# Altium PCB Kame_IMU.PcbDoc
Units mm, origin at the board's own origin, x right, y up, seen from the top; angles counter-clockwise.
Board outline 82.1 x 15 mm, 4 copper layers (Top Layer, Signal Layer 2, Signal Layer 1, Bottom Layer), stack 0.847 mm thick; 51 components, 28 nets, 198 pads, 129 vias.
Unrouted connection lines stored in the file: 16.
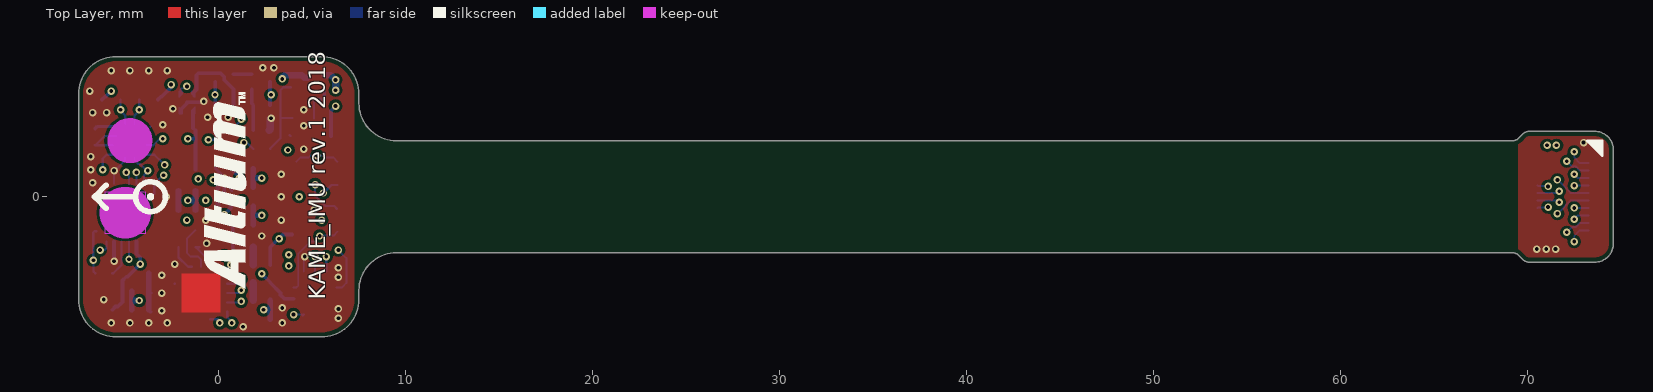
[diagram p0: Top Layer view]
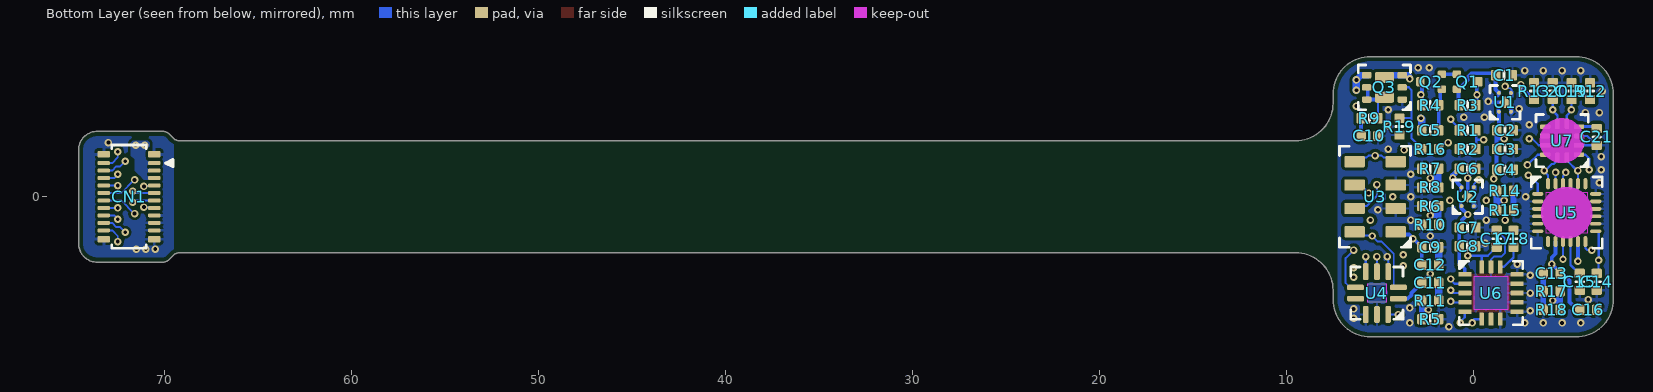
[diagram p1: Bottom Layer view, seen from below]
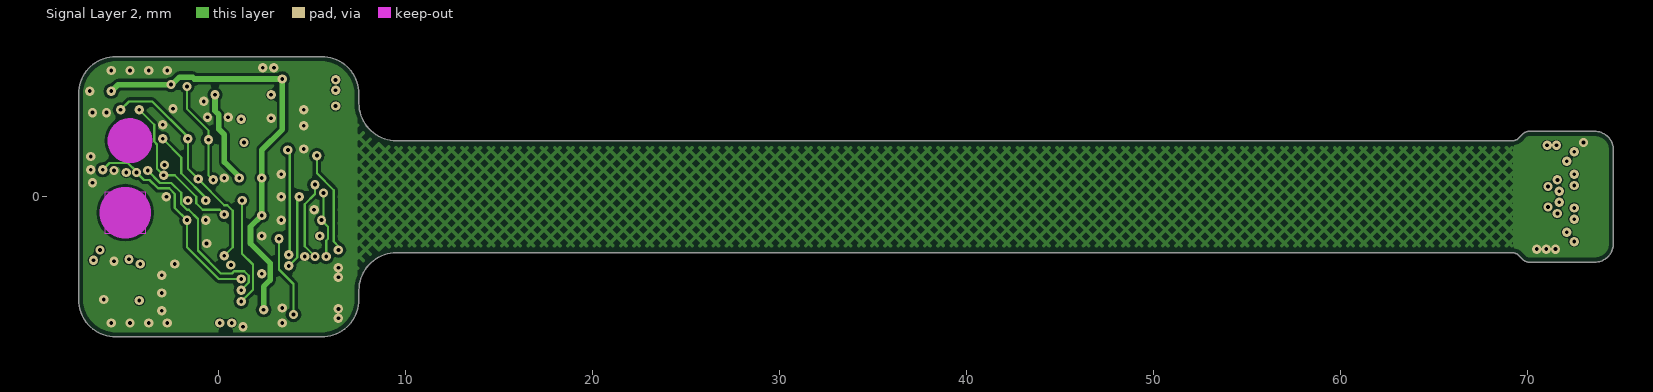
[diagram p2: Signal Layer 2]
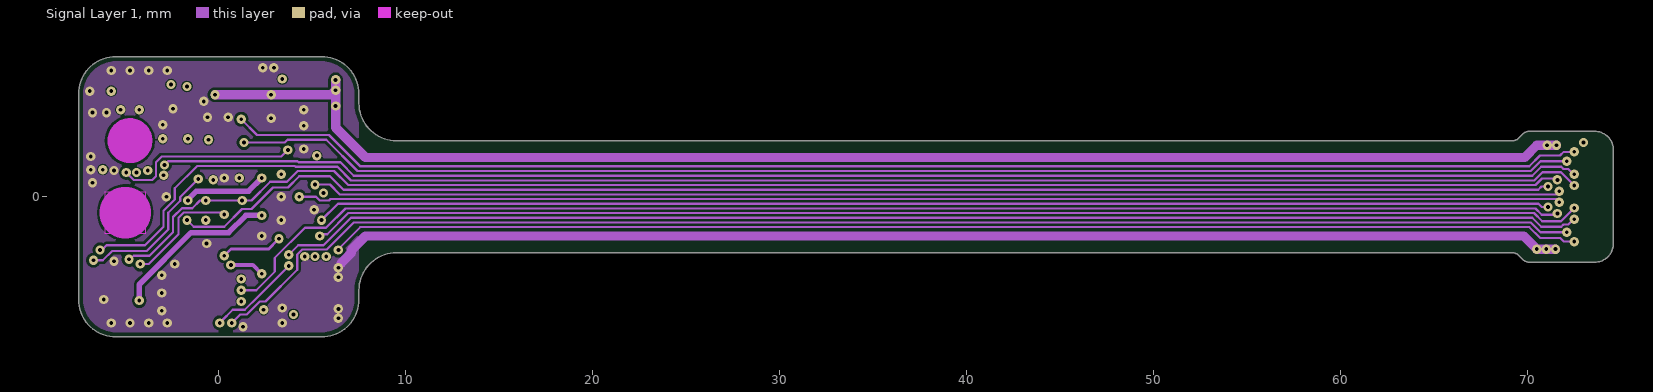
[diagram p3: Signal Layer 1]
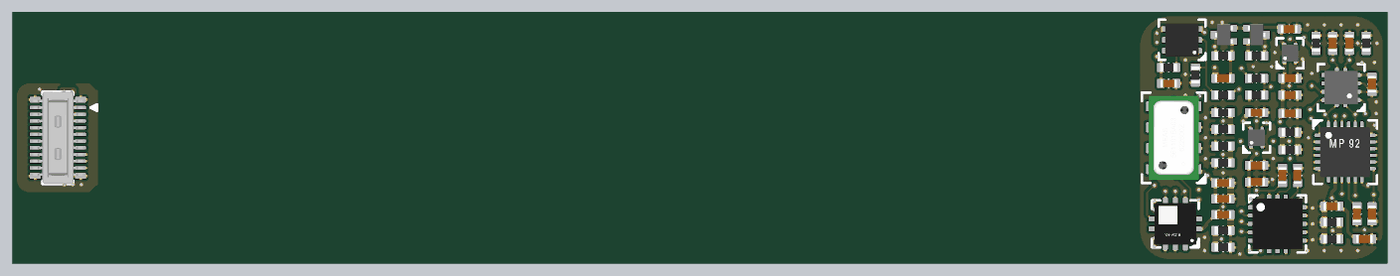
[diagram p4: 3D render of the assembled board from below, using the file's embedded part models]

## Layer stack, top to bottom
Top Solder: solder mask 0.0102, Solder Resist, Dk 3.5
Top Layer: signal copper 0.018
Dielectric 1: dielectric 0.2, FR-4, Dk 4.8
Dielectric 2: dielectric 0.125, Prepreg, Dk 4.2
Coverlay 1: dielectric 0.05, Polyimide, Dk 4.5
Signal Layer 2: signal copper 0.018
Dielectric 4: dielectric 0.025, Polyimide, Dk 4.2
Signal Layer 1: signal copper 0.018
Coverlay 2: dielectric 0.05, Polyimide, Dk 4.5
Dielectric 5: dielectric 0.125, Prepreg, Dk 4.2
Dielectric 6: dielectric 0.2, FR-4, Dk 4.2
Bottom Layer: signal copper 0.018
Bottom Solder: solder mask 0.0102, Solder Resist, Dk 3.5

## Board outline
-5.5,-7.5 5.5,-7.5 ccw(c5.5,-5.5) 7.5,-5.5 7.5,-5 cw(c9.5,-5) 9.5,-3 69.2,-3 cw(c69.2,-3.5) 69.501,-3.101 69.5,-3.1 69.5,-3.106 69.765,-3.372 ccw(c70.1,-3) 70.1,-3.5 73.6,-3.5 ccw(c73.6,-2.5) 74.6,-2.5 74.6,2.5 ccw(c73.6,2.5) 73.6,3.5 70.1,3.5 ccw(c70.1,3) 69.765,3.372 69.765,3.365 69.501,3.101 cw(c69.2,3.5) 69.2,3 9.5,3 cw(c9.5,5) 7.5,5 7.5,5.5 ccw(c5.5,5.5) 5.5,7.5 -5.5,7.5 ccw(c-5.5,5.5) -7.5,5.5 -7.5,-5.5 ccw(c-5.5,-5.5)
board region A: 7.5,-5.697 7.423,-6.083 7.272,-6.447 7.054,-6.775 6.775,-7.053 6.447,-7.272 6.083,-7.423 5.697,-7.5 5.5,-7.5 -5.5,-7.5 -5.697,-7.5 -6.083,-7.423 -6.447,-7.272 -6.775,-7.054 -7.054,-6.775 -7.272,-6.447 -7.423,-6.083 -7.5,-5.697 -7.5,-5.5 -7.5,5.5 -7.5,5.697 -7.423,6.083 -7.272,6.447 -7.054,6.775 -6.775,7.054 -6.447,7.272 -6.083,7.423 -5.697,7.5 -5.5,7.5 5.5,7.5 5.697,7.5 6.083,7.423 6.447,7.272 6.775,7.054 7.054,6.775 7.272,6.447 7.423,6.083 7.5,5.697
board region B: 69.25,-3.003 69.24,-3.002 69.2,-3 9.5,-3 9.304,-3.01 8.919,-3.086 8.557,-3.236 8.231,-3.454 7.954,-3.731 7.736,-4.057 7.586,-4.419 7.51,-4.804 7.5,-5 7.5,5 7.51,4.804 7.586,4.419 7.736,4.057 7.954,3.731 8.231,3.454 8.557,3.236 8.919,3.086 9.304,3.01 9.5,3 69.2,3 69.24,3.002 69.25,3.003
board region C: 69.25,3.003 69.32,3.015 69.396,3.04 69.468,3.078 69.501,3.101 69.765,3.365 69.8,3.402 69.878,3.45 69.964,3.483 70.054,3.5 70.1,3.5 73.6,3.5 73.698,3.5 73.892,3.462 74.074,3.386 74.237,3.277 74.377,3.137 74.486,2.974 74.562,2.792 74.6,2.598 74.6,2.5 74.6,-2.5 74.6,-2.598 74.562,-2.792 74.486,-2.974 74.377,-3.137 74.237,-3.277 74.074,-3.386 73.892,-3.462 73.698,-3.5 73.6,-3.5 70.1,-3.5 70.054,-3.5 69.964,-3.483 69.878,-3.45 69.8,-3.402 69.765,-3.372 69.5,-3.106 69.468,-3.078 69.396,-3.04 69.32,-3.015 69.25,-3.003

## Design rules (kind name [scope] priority, off if disabled: settings)
BoardOutlineClearance [not OnSilkscreen] p1: gap=0.25 ignorepadtopadclearanceinfootprint=FALSE except(0: Arc-SplitBarrior Arc-SplitContinuation Track-SplitBarrior Track-SplitContinuation SMDPad-SplitBarrior SMDPad-SplitContinuation THPad-SplitBarrior THPad-SplitContinuation Via-SplitBarrior Via-SplitContinuation Fill-SplitBarrior Fill-SplitContinuation Poly-SplitBarrior Poly-SplitContinuation Region-SplitBarrior Region-SplitContinuation Text-SplitBarrior Text-SplitContinuation)
Clearance "Outline/NPTH clearance" [(IsThruPin and (PadisPlated = 'False')) or IsBoardOutline or IsBoardCutoutRegion] p1: gap=0.25 ignorepadtopadclearanceinfootprint=FALSE
Clearance "Polygon clearance 18um" [InPolygon] p2: gap=0.15 ignorepadtopadclearanceinfootprint=FALSE except(0.2: Arc-Hole Track-Hole SMDPad-Hole THPad-Hole Via-Hole Fill-Hole Poly-Hole Region-Hole Text-Hole)
Clearance "Default clearance" [All] p3: gap=0.1 ignorepadtopadclearanceinfootprint=FALSE except(0.2: Arc-Hole Track-Hole SMDPad-Hole THPad-Hole Via-Hole Fill-Hole Poly-Hole Region-Hole Text-Hole)
ComponentClearance [All] p1: gap=0.15 collisioncheckmode=3 verticalgap=0.254 showdistances=FALSE
DiffPairsRouting [All] p1: maxlimit=0.5 minlimit=0.2 mostfreqgap=0.3 substack1={CF774DB4-C4B5-4013-BC47-89C42F72042F} toplayer_{cf774db4-c4b5-4013-bc47-89c42f72042f}_minwidth=0.381 toplayer_{cf774db4-c4b5-4013-bc47-89c42f72042f}_maxwidth=0.381 toplayer_{cf774db4-c4b5-4013-bc47-89c42f72042f}_prefwidth=0.381 midlayer1_{cf774db4-c4b5-4013-bc47-89c42f72042f}_minwidth=0.381 midlayer1_{cf774db4-c4b5-4013-bc47-89c42f72042f}_maxwidth=0.381 midlayer1_{cf774db4-c4b5-4013-bc47-89c42f72042f}_prefwidth=0.381 midlayer2_{cf774db4-c4b5-4013-bc47-89c42f72042f}_minwidth=0.381 midlayer2_{cf774db4-c4b5-4013-bc47-89c42f72042f}_maxwidth=0.381 midlayer2_{cf774db4-c4b5-4013-bc47-89c42f72042f}_prefwidth=0.381 bottomlayer_{cf774db4-c4b5-4013-bc47-89c42f72042f}_minwidth=0.381 bottomlayer_{cf774db4-c4b5-4013-bc47-89c42f72042f}_maxwidth=0.381 bottomlayer_{cf774db4-c4b5-4013-bc47-89c42f72042f}_prefwidth=0.381 toplayer_minwidth=0.2 toplayer_maxwidth=0.4 toplayer_prefwidth=0.3 midlayer1_mingap=0.254 midlayer1_maxgap=0.254 midlayer1_prefgap=0.254 midlayer1_minwidth=0.381 midlayer1_maxwidth=0.381 midlayer1_prefwidth=0.381 midlayer2_mingap=0.254 midlayer2_maxgap=0.254 midlayer2_prefgap=0.254 midlayer2_minwidth=0.381 midlayer2_maxwidth=0.381 midlayer2_prefwidth=0.381 bottomlayer_minwidth=0.2 bottomlayer_maxwidth=0.4 bottomlayer_prefwidth=0.3 substack2={EF92E49D-E956-4B48-8936-570E05CDE32B} toplayer_{ef92e49d-e956-4b48-8936-570e05cde32b}_minwidth=0.381 toplayer_{ef92e49d-e956-4b48-8936-570e05cde32b}_maxwidth=0.381 toplayer_{ef92e49d-e956-4b48-8936-570e05cde32b}_prefwidth=0.381 midlayer1_{ef92e49d-e956-4b48-8936-570e05cde32b}_minwidth=0.381 midlayer1_{ef92e49d-e956-4b48-8936-570e05cde32b}_maxwidth=0.381 midlayer1_{ef92e49d-e956-4b48-8936-570e05cde32b}_prefwidth=0.381 midlayer2_{ef92e49d-e956-4b48-8936-570e05cde32b}_minwidth=0.381 midlayer2_{ef92e49d-e956-4b48-8936-570e05cde32b}_maxwidth=0.381 midlayer2_{ef92e49d-e956-4b48-8936-570e05cde32b}_prefwidth=0.381 bottomlayer_{ef92e49d-e956-4b48-8936-570e05cde32b}_minwidth=0.381 bottomlayer_{ef92e49d-e956-4b48-8936-570e05cde32b}_maxwidth=0.381 bottomlayer_{ef92e49d-e956-4b48-8936-570e05cde32b}_prefwidth=0.381 substack3={606AA3D4-FED0-4965-9D04-BDCEF9F4D30A} toplayer_{606aa3d4-fed0-4965-9d04-bdcef9f4d30a}_minwidth=0.381 toplayer_{606aa3d4-fed0-4965-9d04-bdcef9f4d30a}_maxwidth=0.381 toplayer_{606aa3d4-fed0-4965-9d04-bdcef9f4d30a}_prefwidth=0.381 midlayer1_{606aa3d4-fed0-4965-9d04-bdcef9f4d30a}_minwidth=0.381 midlayer1_{606aa3d4-fed0-4965-9d04-bdcef9f4d30a}_maxwidth=0.381 midlayer1_{606aa3d4-fed0-4965-9d04-bdcef9f4d30a}_prefwidth=0.381 midlayer2_{606aa3d4-fed0-4965-9d04-bdcef9f4d30a}_minwidth=0.381 midlayer2_{606aa3d4-fed0-4965-9d04-bdcef9f4d30a}_maxwidth=0.381 midlayer2_{606aa3d4-fed0-4965-9d04-bdcef9f4d30a}_prefwidth=0.381 bottomlayer_{606aa3d4-fed0-4965-9d04-bdcef9f4d30a}_minwidth=0.381 bottomlayer_{606aa3d4-fed0-4965-9d04-bdcef9f4d30a}_maxwidth=0.381 bottomlayer_{606aa3d4-fed0-4965-9d04-bdcef9f4d30a}_prefwidth=0.381 maxuncoupledlength=12.7
HoleSize [All] p1: absolutevalues=TRUE maxlimit=6 minlimit=0.2 maxpercent=80.000 minpercent=20.000
HoleToHoleClearance [All] p1: gap=0.2 allowstackedmicrovias=FALSE
MaximumViaCount [InNet('VCC5FMU')] p1: limit=100
MinimumAnnularRing "Top layer annular ring" [OnLayer('Top Layer')] p1: minimumring=0.1
MinimumAnnularRing "Bottom layer annular ring" [OnLayer('Bottom Layer')] p2: minimumring=0.1
MinimumAnnularRing "L2 annular ring" [OnLayer('Signal Layer 1')] p3: minimumring=0.15
MinimumAnnularRing "L3 annular ring" [OnLayer('Signal Layer 2')] p4: minimumring=0.15
MinimumSolderMaskSliver [All] p1: minsoldermaskwidth=0.1
PlaneClearance [All] p1: clearance=0.2
PlaneConnect [All] p1: pad.planeconnectstyle=Relief pad.reliefexpansion=0.2 pad.reliefentries=4 pad.reliefconductorwidth=0.15 pad.reliefairgap=0.15 via.planeconnectstyle=Direct via.reliefexpansion=0.508 via.reliefentries=4 via.reliefconductorwidth=0.254 via.reliefairgap=0.254
PolygonConnect "Ground polygon connect" [IsPolygon vs InNet('GND') And IsVia] p1: connectstyle=Direct reliefconductorwidth=0.254 reliefentries=4 polygonreliefangle="90 Angle" airgapwidth=0.254
PolygonConnect [All] p2: connectstyle=Relief reliefconductorwidth=0.15 reliefentries=4 polygonreliefangle="90 Angle" airgapwidth=0.15
RoutingVias [All] p1: holewidth=0.2 width=0.4 viastyle="Through Hole" minholewidth=0.2 minwidth=0.4 maxholewidth=0.5 maxwidth=1
SilkToSilkClearance [All] p1: silktosilkclearance=0
SilkToSolderMaskClearance [IsPad] p1: minsilkscreentomaskgap=0.05 clearancetoexposedcopper=TRUE
SolderMaskExpansion [All] p1: expansion=0.05 istentingtop=FALSE
Width [All] p1: maxlimit=1 minlimit=0.1 preferedwidth=0.15 substack1={CF774DB4-C4B5-4013-BC47-89C42F72042F} substack2={EF92E49D-E956-4B48-8936-570E05CDE32B} substack3={606AA3D4-FED0-4965-9D04-BDCEF9F4D30A}
21 further rules are at their usual default settings.

## Classes and differential pairs
component class 2_power: C1 C2 C3 C4 C5 C6 C7 C8 Q1 Q2 R1 R2 R3 R4 U1 U2
component class 3_sensors: C9 C10 C11 C12 C13 C14 C15 C16 C17 C18 C19 C20 C21 CN1 Q3 R5 R6 R7 R8 R9 R10 R11 R12 R13 R14 R15 R16 R17 R18 R19 U3 U4 U5 U6 U7

## Components (designator, comment, footprint, x,y, rotation, side; value= is the part's Value field where it differs from the comment)
C1 "Capacitor 2,2µF +/-20% 10V 0402" CAPC0402(1005)60_L -1.65,6.5 r0 bottom value=2.2µF
C2 "Capacitor 100nF +/-20% 10V 0402" CAPC0402(1005)60_L -1.7,3.55 r0 bottom value=100nF
C3 "Capacitor 10µF +/-40% 6.3V 0402" CAPC0402(1005)60_L -1.7,2.55 r0 bottom value=10µF
C4 "Capacitor 10µF +/-40% 6.3V 0402" CAPC0402(1005)60_L -1.7,1.45 r0 bottom value=10µF
C5 "Capacitor 10µF +/-40% 6.3V 0402" CAPC0402(1005)60_L 2.3,3.55 r180 bottom value=10µF
C6 "Capacitor 2,2µF +/-20% 10V 0402" CAPC0402(1005)60_L 0.3,1.5 r0 bottom value=2.2µF
C7 "Capacitor 100nF +/-20% 10V 0402" CAPC0402(1005)60_L 0.3,-1.65 r0 bottom value=100nF
C8 "Capacitor 10µF +/-40% 6.3V 0402" CAPC0402(1005)60_L 0.3,-2.65 r0 bottom value=10µF
C9 "Capacitor 100nF +/-20% 10V 0402" CAPC0402(1005)60_L 2.3,-2.7 r0 bottom value=100nF
C10 "Capacitor 100nF +/-20% 10V 0402" CAPC0402(1005)60_L 5.55,3.25 r0 bottom value=100nF
C11 "Capacitor 100nF +/-20% 10V 0402" CAPC0402(1005)60_L 2.3,-4.6 r0 bottom value=100nF
C12 "Capacitor 100nF +/-20% 10V 0402" CAPC0402(1005)60_L 2.3,-3.65 r0 bottom value=100nF
C13 "Capacitor 100nF +/-20% 10V 0402" CAPC0402(1005)60_L -4.2,-4.1 r180 bottom value=100nF
C14 "Capacitor 100nF +/-20% 10V 0402" CAPC0402(1005)60_L -6.6,-4.55 r90 bottom value=100nF
C15 "Capacitor 100nF +/-20% 10V 0402" CAPC0402(1005)60_L -5.7,-4.55 r90 bottom value=100nF
C16 "Capacitor 100nF +/-20% 10V 0402" CAPC0402(1005)60_L -6.15,-6.05 r0 bottom value=100nF
C17 "Capacitor 100nF +/-20% 10V 0402" CAPC0402(1005)60_L -1.25,-2.25 r270 bottom value=100nF
C18 "Capacitor 470nF +/-40% 10V 0402" CAPC0402(1005)60_L -2.15,-2.25 r270 bottom value=470nF
C19 "Capacitor 100nF +/-20% 10V 0402" CAPC0402(1005)60_L -5.25,5.65 r270 bottom value=100nF
C20 "Capacitor 100nF +/-20% 10V 0402" CAPC0402(1005)60_L -4.25,5.65 r270 bottom value=100nF
C21 "Capacitor 100nF +/-20% 10V 0402" CAPC0402(1005)60_L -6.6,3.2 r90 bottom value=100nF
CN1 "DF40C-20DP-0.4V(51)" HIRO-DF40C-20DP-0.4V(51)_V 71.9,0 r270 bottom locked
Q1 "MMBT2222AM3T5G" ROHM-SOT723-3_V 0.3,6.15 r180 bottom
Q2 "MMBT2222AM3T5G" ROHM-SOT723-3_V 2.25,6.15 r0 bottom
Q3 "DMC1030UFDBQ-7" DMC1030UFDBQ-7-Footprint-1 4.75,5.85 r0 bottom
R1 "Resistor 1K +/-5 % 0402 63 mW" RESC0402(1005)_L 0.3,3.55 r180 bottom value=1k
R2 "Resistor 1M +/-5 % 0402 63 mW" RESC0402(1005)_L 0.3,2.55 r180 bottom value=1M
R3 "Jumper 0402" RESC0402(1005)_L 0.3,4.9 r0 bottom value=0
R4 "Resistor 1K +/-5 % 0402 63 mW" RESC0402(1005)_L 2.3,4.9 r0 bottom value=1k
R5 "Resistor 240R +/-5 % 0402 63 mW" RESC0402(1005)_L 2.3,-6.55 r180 bottom value=240
R6 "Resistor 240R +/-5 % 0402 63 mW" RESC0402(1005)_L 2.3,-0.5 r0 bottom value=240
R7 "Resistor 240R +/-5 % 0402 63 mW" RESC0402(1005)_L 2.3,1.5 r0 bottom value=240
R8 "Resistor 240R +/-5 % 0402 63 mW" RESC0402(1005)_L 2.3,0.5 r0 bottom value=240
R9 "Resistor 1M +/-5 % 0402 63 mW" RESC0402(1005)_L 5.55,4.2 r0 bottom value=1M
R10 "Resistor 240R +/-5 % 0402 63 mW" RESC0402(1005)_L 2.3,-1.5 r0 bottom value=240
R11 "Resistor 240R +/-5 % 0402 63 mW" RESC0402(1005)_L 2.3,-5.55 r180 bottom value=240
R12 "Resistor 240R +/-5 % 0402 63 mW" RESC0402(1005)_L -6.25,5.65 r90 bottom value=240
R13 "Resistor 240R +/-5 % 0402 63 mW" RESC0402(1005)_L -3.25,5.65 r90 bottom value=240
R14 "Resistor 240R +/-5 % 0402 63 mW" RESC0402(1005)_L -1.7,0.325 r180 bottom value=240
R15 "Resistor 240R +/-5 % 0402 63 mW" RESC0402(1005)_L -1.7,-0.725 r180 bottom value=240
R16 "Resistor 1K +/-5 % 0402 63 mW" RESC0402(1005)_L 2.3,2.55 r0 bottom value=1k
R17 "Resistor 240R +/-5 % 0402 63 mW" RESC0402(1005)_L -4.2,-5.05 r0 bottom value=240
R18 "Resistor 240R +/-5 % 0402 63 mW" RESC0402(1005)_L -4.2,-6.05 r0 bottom value=240
R19 "Resistor 1M +/-5 % 0402 63 mW" RESC0402(1005)_L 3.95,3.75 r90 bottom value=1M
U1 "LP5907SNX-3.3" TI-DQN4-480X480TP_V -1.7,5.05 r90 bottom
U2 "LP5907SNX-3.3" TI-DQN4-480X480TP_V 0.3,0 r90 bottom
U3 "MS561101BA03-50" TECO-MS561101BA03_V 5.25,0 r0 bottom locked
U4 "LPS25HBTR" STM-LGA-10 5.15,-5.15 r0 bottom
U5 "MPU-9250" INSE-QFN-24-1700X1540TP_N -5,-0.85 r180 bottom locked
U6 "ICM-20602" INSE-I62-16 -0.95,-5.15 r180 bottom locked
U7 "LIS3MDLTR" STM-LGA-12 -4.75,3 r0 bottom

## Footprints (in the part's own frame and the unit in brackets; to place one, negate y for a bottom-side part, rotate by r counter-clockwise, add the part's x,y. Pads: shape width x height; smd on the part's side, far side on the other; paste and mask are expansions set on the pad)
CAPC0402(1005)60_L [mm] "Chip Capacitor, Body 1.0x0.5mm, Height 0.6mm, IPC High Density"
  rrect25% 0.5x0.55 smd: 1(-0.45,0) 2(0.45,0)
  silkscreen extent 0,-0.2 0,0.2, body extent -0.5,-0.25 0.5,0.25, height 0.6
DMC1030UFDBQ-7-Footprint-1 [mm]
  rrect40% 0.5x0.35 smd: 1(-0.95,0.65) 2(-0.95,0) 3(-0.95,-0.65) 4(0.95,-0.65) 5(0.95,0) 6(0.95,0.65)
  rrect25% 1x0.6 smd: 3(0,-0.525) 6(0,0.525)
  silkscreen extent -1.4,-1.2 1.4,1.2, body extent -1.04,-1 1.04,1, height 0.65
HIRO-DF40C-20DP-0.4V(51)_V [mm] "CONN, 20-Lead, Body 5.52x1.85mm, Pitch 0.4mm"
  rrect50% 0.2x0.66 smd: 1(-1.8,1.355) 2(-1.8,-1.355) 3(-1.4,1.355) 4(-1.4,-1.355) 5(-1,1.355) 6(-1,-1.355) 7(-0.6,1.355) 8(-0.6,-1.355) 9(-0.2,1.355) 10(-0.2,-1.355) 11(0.2,1.355) 12(0.2,-1.355) 13(0.6,1.355) 14(0.6,-1.355) 15(1,1.355) 16(1,-1.355) 17(1.4,1.355) 18(1.4,-1.355) 19(1.8,1.355) 20(1.8,-1.355)
  rrect35% 0.35x0.66 smd: MP1(-2.275,1.355) MP2(-2.275,-1.355) MP3(2.275,1.355) MP4(2.275,-1.355)
  silkscreen extent -2.76,-0.92 2.76,2.35, body extent -2.76,-1.49 2.76,1.48, height 1.14
INSE-I62-16 [mm] "LGA, 16-Leads, Body 3x3mm, Pitch 0.5mm"
  rrect25% 0.7x0.25 smd: 1(-1.4,1) 2(-1.4,0.5) 3(-1.4,0) 4(-1.4,-0.5) 5(-1.4,-1) 9(1.4,-1) 10(1.4,-0.5) 11(1.4,0) 12(1.4,0.5) 13(1.4,1)
  rrect25% 0.25x0.7 smd: 6(-0.5,-1.4) 7(0,-1.4) 8(0.5,-1.4) 14(0.5,1.4) 15(0,1.4) 16(-0.5,1.4)
  Top Layer keep-out region: -0.9,0.9 0.9,0.9 0.9,-0.9 -0.9,-0.9
  silkscreen extent -1.7,-1.7 1.7,1.7, body extent -1.5,-1.5 1.5,1.5, height 0.75
INSE-QFN-24-1700X1540TP_N [mm] "QFN, 24-Leads, Body 3.1x3.1mm, Pitch 0.40mm, Thermal Pad 1.54x1.70mm, IPC Medium Density"
  oval 0.6x0.2 smd: 1(-1.55,1) 2(-1.55,0.6) 3(-1.55,0.2) 4(-1.55,-0.2) 5(-1.55,-0.6) 6(-1.55,-1) 13(1.55,-1) 14(1.55,-0.6) 15(1.55,-0.2) 16(1.55,0.2) 17(1.55,0.6) 18(1.55,1)
  oval 0.2x0.6 smd: 7(-1,-1.55) 8(-0.6,-1.55) 9(-0.2,-1.55) 10(0.2,-1.55) 11(0.6,-1.55) 12(1,-1.55) 19(1,1.55) 20(0.6,1.55) 21(0.2,1.55) 22(-0.2,1.55) 23(-0.6,1.55) 24(-1,1.55)
  Keep-Out Layer region: -1.1,1.1 1.1,1.1 1.1,-1.1 -1.1,-1.1
  silkscreen extent -1.9,-1.9 1.9,1.9, body extent -1.51,-1.51 1.51,1.51, height 1.04
RESC0402(1005)_L [mm] "Chip Resistor, Body 1.0x0.5mm, IPC High Density"
  rrect25% 0.5x0.55 smd: 1(-0.45,0) 2(0.45,0)
  silkscreen extent 0,-0.2 0,0.2, body extent -0.5,-0.25 0.5,0.25, height 0.3
ROHM-SOT723-3_V [mm] "SOT723, 3-Leads, Body 1.2x0.8mm, Pitch 0.8mm"
  rrect30% 0.45x0.4 smd: 1(-0.575,0.4) 2(-0.575,-0.4)
  rrect30% 0.45x0.5 smd: 3(0.575,0)
  body extent -0.53,-0.63 0.53,0.63, height 0.45
STM-LGA-10 [mm] "LGA, 10-Leads, Body 2.5x2.5mm, Pitch 0.6mm"
  rrect50% 0.9x0.3 smd: 1(-1.145,0.3) 2(-1.145,-0.3) 6(1.145,-0.3) 7(1.145,0.3)
  rrect50% 0.3x0.9 smd: 3(-0.6,-1.145) 4(0,-1.145) 5(0.6,-1.145) 8(0.6,1.145) 9(0,1.145) 10(-0.6,1.145)
  Top Layer keep-out region: -0.5,0.5 0.5,0.5 0.5,-0.5 -0.5,-0.5
  silkscreen extent -1.4,-1.4 1.4,1.4, body extent -1.25,-1.25 1.25,1.25, height 0.8
STM-LGA-12 [mm] "LGA, 12-Leads, Body 2x2mm, Pitch 0.5mm"
  rrect50% 0.55x0.25 smd: 1(-0.901,0.75) 2(-0.901,0.25) 3(-0.901,-0.25) 4(-0.901,-0.75) 7(0.901,-0.75) 8(0.901,-0.25) 9(0.901,0.25) 10(0.901,0.75)
  rrect50% 0.25x0.55 smd: 5(-0.25,-0.9) 6(0.25,-0.9) 11(0.25,0.9) 12(-0.25,0.9)
  Keep-Out Layer region: -0.5,0.5 0.5,0.5 0.5,-0.5 -0.5,-0.5
  silkscreen extent -1.4,-1.4 1.4,1.4, body extent -1,-1 1,1, height 0.95
TECO-MS561101BA03_V [mm] "SMD, 8-Leads, Body 3x5mm, Pitch 1.25mm"
  rrect20% 1.1x0.6 smd: 1(-1.1,1.875) 2(-1.1,0.625) 3(-1.1,-0.625) 4(-1.1,-1.875) 5(1.1,-1.875) 6(1.1,-0.625) 7(1.1,0.625) 8(1.1,1.875)
  silkscreen extent -1.9,-2.7 1.9,2.7, body extent -1.5,-2.5 1.5,2.5, height 0.73
TI-DQN4-480X480TP_V [mm] "SON, 4-Leads, Body 1x1mm, Pitch 0.65mm, Thermal Pad 0.5x0.5mm"
  round 0.2 smd mask+0: 1(-0.5,0.325) 2(-0.5,-0.325) 3(0.5,-0.325) 4(0.5,0.325)
  rrect25% 0.48x0.48 smd rot 45 paste+0.005: 5(0,0)
  Top Layer region: -0.225,0.45 -0.225,0.425 -0.425,0.225 -0.6,0.225 -0.625,0.25 -0.625,0.425 -0.6,0.45
  Top Layer region: 0.275,0.45 0.275,0.375 0.425,0.225 0.6,0.225 0.625,0.25 0.625,0.425 0.6,0.45
  Top Layer region: 0.275,-0.45 0.275,-0.375 0.425,-0.225 0.6,-0.225 0.625,-0.25 0.625,-0.425 0.6,-0.45
  Top Layer region: -0.275,-0.45 -0.275,-0.375 -0.425,-0.225 -0.6,-0.225 -0.625,-0.25 -0.625,-0.425 -0.6,-0.45
  silkscreen extent -0.9,-0.8 0.9,0.8, body extent -0.5,-0.5 0.5,0.5, height 0.35

## Part data
C1 C6: library part CMP-001-00056-2, "Chip Capacitor, 2,2µF +/-20%, 10V, 0402, Thickness 0.6 mm", Case/Package=0603, Max Operating Temperature=85°C, Min Operating Temperature=-55°C, Tolerance=10%, Voltage Rating=10V, Mounting Technology=SMT, Pins=2
C2 C7 C9 C10 C11 C12 C13 C14 C15 C16 C17 C19 C20 C21: library part CMP-001-00061-2, "Chip Capacitor, 100nF +/-20%, 10V, 0402, Thickness 0.6 mm", Case/Package=0402, Max Operating Temperature=85°C, Min Operating Temperature=-55°C, Tolerance=20%, Voltage Rating=10V, Mounting Technology=SMT, Pins=2
C3 C4 C5 C8: library part CMP-001-00074-2, "Chip Capacitor, 10µF +/-40%, 6.3V, 0402, Thickness 0.6 mm", Case/Package=0402, Max Operating Temperature=85°C, Min Operating Temperature=-55°C, Tolerance=10%, Voltage Rating=6.3V, Mounting Technology=SMT, Pins=2
C18: library part CMP-001-00060-2, "Chip Capacitor, 470nF +/-40%, 10V, 0402, Thickness 0.6 mm", Case/Package=0805, Max Operating Temperature=85°C, Min Operating Temperature=-55°C, Tolerance=20%, Voltage Rating=10V, Mounting Technology=SMT, Pins=2
CN1: library part CMP-002-00057-1, "Plug Connector, 30 V, 0.3 A, -35 to 85 degC, RoHS, Tape and Reel", Pins=24, System=Connector
Q1 Q2: library part CMP-013-00028-1, "NPN General Purpose Transistor, 3-Pin SOT-723, Pb-Free, Tape and Reel", Case/Package=SOT-723, ComponentLink1Description="Manufacturer URL", ComponentLink1URL=http://www.onsemi.com/, ComponentLink2Description=Datasheet, ComponentLink2URL=http://www.onsemi.cn/pub_link/Collateral/MMBT2222AM3-D.PDF, ComponentLink3Description="Package Specification", ComponentLink3URL=http://www.onsemi.com/pub_link/Collateral/631AA.PDF, Mounting Technology=SMT, Pins=3, RoHS Compliant=TRUE
Q3: library part CMP-013-00033-1, "MOSFET N/P-CH 12V 5.1A UDFN2020", Max Operating Temperature=150°C, Min Operating Temperature=-55°C, Pins=6
R1 R4 R16: library part CMP-009-00157-2, "Chip Resistor, 1 kOhms, +/-5 %, 63 mW, -55 to 155 degC, 0402", Case/Package=0402, Max Operating Temperature=155°C, Min Operating Temperature=-55°C, Power=63mW, Tolerance=5%, Pins=2
R2 R9 R19: library part CMP-009-00151-2, "Chip Resistor, 1 MOhms, +/-5 %, 63 mW, -55 to 155 degC, 0402", Case/Package=0402, Max Operating Temperature=155°C, Min Operating Temperature=-55°C, Power=63mW, Tolerance=5%, Pins=2
R3: library part CMP-009-00148-2, Case/Package=0402, Max Operating Temperature=155°C, Min Operating Temperature=-55°C, Pins=2
R5 R6 R7 R8 R10 R11 R12 R13 R14 R15 R17 R18: library part CMP-009-00155-2, "Chip Resistor, 240 Ohms, +/-5 %, 63 mW, -55 to 155 degC, 0402", Case/Package=0402, Max Operating Temperature=155°C, Min Operating Temperature=-55°C, Power=63mW, Tolerance=5%, Pins=2
U1 U2: library part CMP-019-00040-1, "Ultra-Low-Noise, Low-IQ LDO, 3.3 V, 0.25 A, -40 to 125 degC, 4-Pin X2SON, RoHS, Tape and Reel", Max Operating Temperature=125°C, Min Operating Temperature=-40°C, Output Voltage=3.3V, Pins=5
U3: library part CMP-010-00021-1, "Barometric Pressure Sensor, 1.8 to 3.6 V, -40 to 85 degC, 8-Pin SMD, RoHS, Tape and Reel", Case/Package=LGA-8, Max Operating Temperature=85°C, Max Supply Voltage=3.6V, Min Operating Temperature=-40°C, Min Supply Voltage=1.8V, Mounting Technology=SMT, Pins=8, RoHS Compliant=Yes, Sensor Type=Barometer
U4: library part CMP-010-00020-1, "MEMS Pressure Sensor, 1.7 to 3.6 V, -30 to 105 degC, 10-Pin LGA, RoHS, Tray", Case/Package=LGA-10, Max Operating Temperature=105°C, Max Supply Voltage=3.6V, Min Operating Temperature=-30°C, Min Supply Voltage=1.7V, Mounting Technology=SMT, Pins=10, RoHS Compliant=Yes, Sensor Type=Barometer
U5: library part CMP-010-00022-1, "9-axis MotionTracking device, 2.4 to 3,6 V, -40 to 85 degC, 24-Pin QFN, RoHS, Tape and Reel", Case/Package=QFN, Max Operating Temperature=85°C, Max Supply Voltage=3.6V, Min Operating Temperature=-40°C, Min Supply Voltage=2.4V, Mounting Technology=SMT, Pins=24, Sensor Type=Accelerometer,Gyroscope,Magnetometer
U6: library part CMP-010-00023-1, "High Performance 6-Axis MEMS MotionTracking(TM) Device, 1.71 to 3.45 V, -40 to 85 degC, 16-Pin LGA, RoHS", Case/Package=LGA-16, Max Operating Temperature=85°C, Max Supply Voltage=3.45V, Min Operating Temperature=-40°C, Min Supply Voltage=1.71V, Mounting Technology=SMT, Pins=16, RoHS Compliant=Yes, Sensor Type="6 Axis,Accelerometer,Gyroscope,Temperature"
U7: library part CMP-010-00019-1, "Digital Output Magnetic Sensor, 1.9 to 3.6 V, -40 to 85 degC, 12-Pin LGA, RoHS, Tape and Reel", Case/Package=LGA-12, Max Operating Temperature=85°C, Max Supply Voltage=3.6V, Min Operating Temperature=-40°C, Min Supply Voltage=1.9V, Mounting Technology=SMT, Pins=12, RoHS Compliant=Yes, Sensor Type=Magnetometer

## Via types
v1: diameter 0.4/0.5/0.5/0.4 (per signal layer), hole 0.2, Top Layer to Bottom Layer, tented both sides, 129 vias

## Nets (pads, with @x,y where several pads share a name; then routed paths per layer and width w, separated by ;. In a path a pad name is that pad's centre, name@x,y a point inside that pad or via, vN(x,y) a via of type N, cw(c..) or ccw(c..) an arc to the next point about the centre after c; other vN are vias at no path point)
GND: C1.1 C2.1 C3.1 C4.1 C5.1 C6.1 C7.1 C8.1 C9.1 C10.1 C11.1 C12.1 C13.1 C14.1 C15.1 C16.1 C17.1 C18.1 C19.1 C20.1 C21.1 CN1.15 CN1.17 CN1.19 CN1.MP1 CN1.MP2 CN1.MP3 CN1.MP4 Q3.1 R2.1 R5.2 R6.2 R7.2 R8.2 R10.2 R11.2 R12.2 R13.2 R14.2 R15.2 R17.2 R18.2 R19.1 U1.2 U1.5 U2.2 U2.5 U3.2 U3.3 U4.3 U4.8 U4.9 U5.2 U5.3 U5.4 U5.5 U5.6 U5.11 U5.14 U5.15 U5.16 U5.17 U5.18 U5.20 U6.8 U6.9 U6.10 U6.11 U6.12 U6.13 U6.15 U7.2 U7.3 U7.12 | length 84.5
  Signal Layer 1 w0.5: 6.55,-3.55 7.1,-3 7.1,-2.85 7.85,-2.1 9.15,-2.1 69.1,-2.1 ; 69,-2.1 69.8,-2.1 v1(70.5,-2.8) v1(71.5,-2.8)
  Bottom Layer w0.1: C17.1@-1.25,-1.795 -1.7,-2.245 -1.7,-3 -1.5,-3.2 -1.1,-3.2 -0.95,-3.35 U6.15 ; U4.3 v1@4.55,-3.246
  Bottom Layer w0.12: C21.1@-6.628,2.773 C21.1@-6.6,2.745 ; U7.2 -6.595,2.75 C21.1@-6.6,2.745 ; U5.20 -5.6,1.35 -5,1.95 U7.12 ; U7.3@-5.451,3.25 -6.095,3.25 C21.1@-6.6,2.745 ; R19.1@3.8,3.295 R19.1@3.85,3.245
  Bottom Layer w0.2: v1@-5.65,-3.45 -5.6,-3.4 U5.11 ; R18.2@-3.745,-6.05 R18.2@-3.645,-6.15 ; R17.2@-3.745,-5.05 R17.2@-3.645,-5.15 ; -3.745,-4.6 -3.695,-4.65 ; C13.1@-3.745,-4.1 C13.1@-3.695,-4.15 ; -2.05,4.65 -1.7,5 U1.5 -0.85,5.05 v1(-0.8,5.1) ; C6.1@-0.155,1.64 -0.155,1.5 0.3,1.045 v1(0.3,1) U2.5 U2.5@0.35,0 ; -0.05,-0.4 U2.5@0.35,0 ; U2.5@0.35,0.002 U2.5@0.35,0
  Bottom Layer w0.3: R18.2@-3.745,-6.05 -3.745,-5.05 -3.745,-4.6 C13.1@-3.745,-4.1 ; R15.2@-2.155,-0.725 R14.2@-2.155,0.325
  Bottom Layer w0.4: R11.2@1.845,-5.55 C11.1@1.845,-4.6 ; C12.1@1.845,-3.65 C9.1@1.845,-2.7 ; C5.1@2.7,3.55 2.76,3.61 2.76,4.16 v1(2.8,4.2)
  other v1: 1.3,-6.95 -5.75,-6.75 -4.75,-6.75 -3.75,-6.75 -2.75,-6.75 3.4,-6.75 6.4,-6.5 -3.05,-6.1 6.4,-6 3.4,-5.95 -6.15,-5.5 -3.05,-5.15 6.4,-4.3 -3.05,-4.2 6.4,-3.8 -2.35,-3.6 -5.6,-3.45 4.6,-3.2 71,-2.8 -0.65,-2.5 2.3,-2.1 -0.7,-1.25 3.35,-1.25 5.1,-0.7 -2.8,0 3.35,0 -6.75,0.75 3.35,1.2 -5.6,1.4 -6.85,1.45 -6.85,2.15 4.55,2.55 73,2.9 4.55,3.8 -3,3.85 -0.6,4.25 0.5,4.25 -6.75,4.5 -6,4.5 4.55,4.65 -2.45,4.7 -6.9,5.65 -5.75,6.75 -4.75,6.75 -3.75,6.75 -2.75,6.75 2.35,6.9 2.95,6.9
ICM_INT#: CN1.11 U6.6 | length 78.4
  Signal Layer 1 w0.12: v1(0.05,-6.75) v1@0.15,-6.65 ; v1@0.15,-6.75 v1@0.15,-6.65 ; v1(3.75,-3.7) 2.1,-5.35 2.096,-5.35 1.396,-6.05 0.75,-6.05 v1@0.15,-6.65 ; v1(4.3,0) 5.2,0 5.4,-0.2 5.9,-0.2 5.975,-0.125 71.6,-0.125 v1@71.675,-0.125
  Signal Layer 2 w0.12: v1(3.75,-3.7) 4.2,-3.25 4.2,-0.1 v1(4.3,0)
  Bottom Layer w0.1: CN1.11 71.519,-0.2 71.619,-0.3 v1(71.7,-0.3)
  Bottom Layer w0.12: U6.6 -0.05,-6.55 v1@0.15,-6.75
IMU_HEAT_CTL: CN1.4 R16.1 | length 73.7
  Signal Layer 1 w0.12: v1(1.35,2.9) 3.526,2.9 3.676,3.05 5.75,3.05 7.425,1.375 70.175,1.375 70.7,1.9 v1(72.1,1.9)
  Bottom Layer w0.1: v1(72.1,1.9) 72.379,1.621 72.579,1.621 72.8,1.4 CN1.4
  Bottom Layer w0.12: v1(1.35,2.9) 1.495,2.9 R16.1@1.845,2.55
MPU_INT#: CN1.8 U5.12 | length 83.9
  Signal Layer 1 w0.12: v1(-6.35,-2.85) -6.25,-2.85 -6,-2.6 -3.95,-2.6 -2.95,-1.6 -2.95,-0.75 -2.35,-0.15 -2.35,0.45 -1.15,1.65 4.05,1.65 4.1,1.6 6.35,1.6 7.075,0.875 70.364,0.875 70.799,1.31 71.79,1.31 v1(72.5,0.6)
  Bottom Layer w0.1: v1(72.5,0.6) CN1.8
  Bottom Layer w0.12: v1@-6.35,-2.95 -6.3,-2.95 -6.2,-2.85 -6.1,-2.85 -6,-2.75 U5.12
NetC5_2: C5.2 Q2.1 R4.1 | length 2.2
  Bottom Layer w0.2: Q2.1@1.76,5.75 1.76,4.99 R4.1 C5.2
NetC15_2: C15.2 U5.10 | length 1.9
  Bottom Layer w0.12: C15.2@-5.7,-4.095 -5.645,-4.095 -5.2,-3.65 U5.10
NetC18_2: C18.2 U6.14 | length 1.5
  Bottom Layer w0.12: C18.2@-2.15,-2.705 -2.15,-3.25 -1.65,-3.75 U6.14
NetC21_2: C21.2 U7.4 | length 1
  Bottom Layer w0.165: C21.2@-6.505,3.75 U7.4
  Bottom Layer w0.2: C21.2@-6.6,3.655 C21.2@-6.505,3.75
NetQ1_1: Q1.1 Q2.2 | length 1
  Bottom Layer w0.2: Q1.1@0.79,6.55 Q2.2@1.76,6.55
NetQ3_2: Q3.2 R16.2 R19.2 | length 4.7
  Bottom Layer w0.12: R16.2 2.75,2.575 3.3,3.125 3.3,4.15 ; Q3.2@3.85,5.85 Q3.2 3.45,5.85 3.3,5.7 3.3,4.15 ; R19.2@3.95,4.205 3.355,4.205 3.3,4.15
NetQ3_5: Q3.5 Q3.6 R9.1 | length 2.3
  Bottom Layer w0.12: Q3.6@5.05,5.2 5.095,5.155 R9.1@5.095,4.2
  Bottom Layer w0.2: Q3.6@5.05,5.2 5.65,5.2 Q3.5@5.65,5.85
SPI1_CLK: CN1.7 U5.23 U6.2 U7.1 | length 89.1
  Signal Layer 1 w0.12: v1(-1.7,-1.25) -1.34,-1.61 0.29,-1.61 1.25,-0.65 1.75,-0.65 2.9,0.5 3.7,0.5 4.3,1.1 5.95,1.1 6.675,0.375 8.25,0.375 70.575,0.375 70.75,0.55 v1(71.1,0.55)
  Signal Layer 2 w0.12: v1(-6.2,1.45) -5.84,1.81 -4.86,1.81 -4.4,1.35 v1(-4.4,1.3) -4,0.9 -3.7,0.9 -3.25,0.45 -2.65,0.45 -2.35,0.15 -2.35,-0.6 v1(-1.7,-1.25) -1.7,-2.7 0,-4.4 1.15,-4.4 v1@1.2,-4.45
  Bottom Layer w0.1: CN1.7 70.57,0.575 71.075,0.575 v1(71.1,0.55)
  Bottom Layer w0.12: v1(-6.2,1.45) -6.2,2.05 -6,2.25 U7.1 ; U5.23 v1(-4.4,1.3) ; U6.2 1,-4.65 1.15,-4.5 v1@1.2,-4.5
  other v1: 1.2,-4.4
SPI1_CS_ICM#: CN1.18 U6.5 | length 76.4
  Signal Layer 1 w0.12: v1(0.7,-6.75) 1.15,-6.3 1.5,-6.3 2.2,-5.6 2.5,-5.6 4.2,-3.9 4.2,-3.091 4.471,-2.82 5.78,-2.82 7.225,-1.375 70.175,-1.375 70.7,-1.9 v1(72.1,-1.9)
  Bottom Layer w0.1: v1(72.1,-1.9) 72.379,-1.621 72.579,-1.621 72.8,-1.4 CN1.18
  Bottom Layer w0.12: U6.5 0.45,-6.45 0.7,-6.7 v1(0.7,-6.75)
SPI1_CS_LIS3#: CN1.6 U7.10 | length 78.1
  Signal Layer 1 w0.12: v1@-2.85,1.75 -2.7,1.9 4.2,1.9 4.26,1.84 6.51,1.84 7.225,1.125 70.261,1.125 70.736,1.6 71.811,1.6 71.921,1.49 72.182,1.49 v1@72.472,1.2
  Bottom Layer w0.1: v1(72.5,1.2) 72.7,1 CN1.6
  Bottom Layer w0.12: U7.10 -3.45,2.25 -3,1.8 v1@-2.85,1.8
  other v1: -2.9,1.7
SPI1_CS_MPU#: CN1.16 U5.22 | length 87
  Signal Layer 1 w0.12: v1(-4.95,1.3) -4.55,0.9 -3.55,0.9 -3.35,1.1 -3.35,1.85 -3.05,2.15 3.35,2.15 v1(3.7,2.5) ; v1(3.75,-3.1) 4.25,-2.6 5.6,-2.6 7.075,-1.125 70.261,-1.125 70.736,-1.6 71.811,-1.6 71.921,-1.49 72.182,-1.49 72.472,-1.2 v1(72.5,-1.2)
  Signal Layer 2 w0.12: v1@3.8,-3.15 v1@3.8,2.5
  Bottom Layer w0.1: v1(72.5,-1.2) 72.7,-1 CN1.16
  Bottom Layer w0.12: v1(-4.95,1.3) -4.95,1.25 -4.8,1.1 U5.22
SPI1_MISO: CN1.10 U5.9 U6.4 U7.9 | length 94.2
  Signal Layer 1 w0.12: v1@-4.8,-3.3 -4.7,-3.3 -4.55,-3.15 -3.7,-3.15 -2.45,-1.9 -2.45,-1.089 -1.971,-0.61 -1.41,-0.61 -1,-0.2 v1(-0.7,-0.2) v1(1.25,-0.2) 1.75,-0.2 2.75,0.8 3.65,0.8 4.23,1.38 6.17,1.38 6.925,0.625 70.425,0.625 70.773,0.973 71.527,0.973 v1(71.6,0.9)
  Signal Layer 2 w0.12: v1(-3,3.1) -2,2.1 -2,1.25 -0.6,-0.15 v1@-0.6,-0.2 ; v1(1.2,-5.6) 1.83,-4.97 1.83,-3.63 1.25,-3.05 v1(1.25,-0.2)
  Bottom Layer w0.1: v1(71.6,0.9) 71.609,0.9 72.309,0.2 CN1.10
  Bottom Layer w0.12: U5.9 -4.8,-3.3 v1@-4.75,-3.35 ; U7.9 -3.5,2.75 -3.15,3.1 v1(-3,3.1) ; U6.4 1.15,-5.65 v1(1.2,-5.6)
  other v1: -4.8,-3.35
SPI1_MOSI: CN1.12 U5.24 U6.3 U7.11 | length 87.5
  Signal Layer 1 w0.12: v1(1.2,-5) 2.005,-5 3,-4.005 3,-3.27 4.61,-1.66 5.74,-1.66 6.775,-0.625 70.425,-0.625 70.76,-0.96 71.54,-0.96 v1(71.6,-0.9)
  Signal Layer 2 w0.12: v1(-3.8,1.4) -3.14,0.74 -2.54,0.74 -2.01,0.21 -2.01,-0.39 -1.7,-0.7 -1.6,-0.7 -1.11,-1.19 -1.11,-2.879 0.111,-4.1 0.709,-4.1 0.819,-3.99 1.37,-3.99 1.61,-4.23 1.61,-4.59 v1(1.2,-5)
  Bottom Layer w0.1: v1(71.6,-0.9) 71.609,-0.9 72.309,-0.2 CN1.12
  Bottom Layer w0.12: U7.11 -4.5,1.95 -4.3,1.75 -4.2,1.75 -4.125,1.675 v1@-3.9,1.45 ; U5.24 -4,1.15 v1@-3.7,1.45 ; U6.3 1.15,-5.15 1.2,-5.1 v1@1.2,-5.05
SPI2_CLK: CN1.14 U3.8 U4.2 | length 73.4
  Signal Layer 1 w0.12: v1@5.425,-2.025 5.45,-2 5.8,-2 6.925,-0.875 70.353,-0.875 70.788,-1.31 71.79,-1.31 v1(72.5,-0.6)
  Bottom Layer w0.1: U4.2 4.152,-4.85 4.25,-4.752 4.25,-3.055 4.905,-2.4 5.1,-2.4 v1(5.4,-2.1) 5.417,-2.083 6.142,-2.083 U3.8 ; v1(72.5,-0.6) CN1.14
SPI2_CS_LPS25#: CN1.20 U3.4 U3.5 U4.6 | length 78.5
  Signal Layer 1 w0.12: v1@6.45,-2.75 7.575,-1.625 70.1,-1.625 70.675,-2.2 71.739,-2.2 71.939,-2.4 v1(72.5,-2.4)
  Signal Layer 2 w0.12: v1(5.25,2.2) 5.25,1.25 6.15,0.35 6.15,-2.4 6.45,-2.7 v1@6.45,-2.75
  Bottom Layer w0.1: U3.4 4.375,2.1 4.8,2.1 4.9,2.2 v1(5.25,2.2) 5.6,2.2 5.7,2.1 6.125,2.1 U3.5 ; U4.6 6.595,-4.85 6.831,-4.614 6.831,-3.281 v1(6.4,-2.85) ; v1(72.5,-2.4) 72.5,-2.1 72.8,-1.8 CN1.20
SPI2_MISO: CN1.13 U3.6 U4.5 | length 72.1
  Signal Layer 1 w0.12: v1(5.5,-1.25) 6.375,-0.375 70.588,-0.375 70.763,-0.55 v1(71.1,-0.55)
  Signal Layer 2 w0.12: v1@5.7,0.3 5.6,0.3 v1(5.6,0.2) 5.6,-1.15 v1(5.5,-1.25) 5.85,-1.6 5.85,-2.25 5.75,-2.35 v1(5.75,-3.2)
  Bottom Layer w0.1: CN1.13 70.57,-0.575 71.075,-0.575 v1(71.1,-0.55)
  Bottom Layer w0.12: v1@5.625,0.225 6.025,0.625 U3.6 ; U4.5 v1(5.75,-3.2)
SPI2_MOSI: CN1.9 U3.7 U4.4 | length 75.2
  Signal Layer 1 w0.12: v1(5.15,0.65) 5.95,0.65 6.475,0.125 v1@71.675,0.125 ; v1@71.8,0.25 v1@71.8,0.3
  Signal Layer 2 w0.12: v1@5.15,-3.1 5.05,-3.1 4.6,-2.65 4.6,-0.4 5.15,0.15 v1@5.15,0.6
  Bottom Layer w0.1: CN1.9 71.519,0.2 71.619,0.3 v1(71.7,0.3)
  Bottom Layer w0.12: U4.4 v1(5.15,-3.2) v1@5.15,-3.1 ; v1(5.15,0.65) 5.15,0.05 5.7,-0.5 6.175,-0.5 U3.7@6.325,-0.65
SPWR_ON: CN1.2 R1.1 | length 74.6
  Signal Layer 1 w0.12: v1(1.2,4.15) 2.05,3.3 5.9,3.3 7.55,1.65 7.55,1.625 11.703,1.625 70.1,1.625 70.675,2.2 71.739,2.2 71.939,2.4 v1(72.5,2.4)
  Bottom Layer w0.1: v1(72.5,2.4) 72.5,2.1 72.8,1.8 CN1.2
  Bottom Layer w0.12: R1.1@0.755,3.55 0.755,3.655 1.2,4.1 v1(1.2,4.15)
SPWR_ON_R: R1.2 R2.2 U1.3 U2.3 | length 8.1
  Signal Layer 2 w0.1: v1(-1.7,5.9) -1.7,4.7 -0.55,3.55 v1(-0.55,3.05) -0.55,1.15 v1(-0.3,0.9)
  Bottom Layer w0.1: U1.3 -2.044,5.569 -2.044,5.741 -1.986,5.8 -1.881,5.8 -1.781,5.9 v1(-1.7,5.9) ; v1@-0.25,0.9 -0.025,0.675 U2.3
  Bottom Layer w0.12: v1@-0.55,3.1 -0.5,3.05 -0.155,3.05 ; R2.2@-0.155,2.55 -0.155,3.05 ; R1.2@-0.155,3.55 -0.155,3.05
VCC3: C7.2 C8.2 C11.2 C13.2 C16.2 C20.2 U2.1 U4.1 U5.1 U5.8 U6.1 U7.6 | length 30.1
  Signal Layer 1 w0.12: v1(-4.2,-3.6) -3.75,-3.6 -2.15,-2 -2.15,-1.12 -1.87,-0.84 0.19,-0.84 v1(0.3,-0.95)
  Signal Layer 1 w0.2: v1(0.65,-3.65) 1.825,-3.65 v1(2.3,-4.125)
  Signal Layer 2 w0.12: v1@-4.25,4.6 -4.2,4.65 -4.2,4.6 -3.45,3.85 -3.45,2.95 -3.3,2.8 -3.3,1.5 v1(-2.95,1.15) -2.35,1.15 -1.2,0 -1.2,-0.35 -0.85,-0.7 0.05,-0.7 v1(0.3,-0.95)
  Bottom Layer w0.12: U7.6 -4.5,4.35 -4.25,4.6 v1(-4.25,4.65) C20.2@-4.25,5.195 ; U5.1 -3.45,0.7 -3,1.15 v1(-2.95,1.15) v1@-2.85,1.15
  Bottom Layer w0.2: C16.2@-5.695,-6.05 -5.52,-5.875 -5.4,-5.875 -5.15,-5.625 -5.15,-4.475 -4.95,-4.275 -4.875,-4.275 -4.675,-4.075 v1(-4.2,-3.6) -4.2,-3.25 -4.4,-3.05 U5.8 ; U6.1 0.45,-3.85 v1(0.65,-3.65) 0.755,-3.545 0.755,-1.65 0.6,-1.495 0.6,-1.25 v1(0.3,-0.95) 0.625,-0.625 U2.1 ; v1(2.3,-4.125) 2.75,-4.575 C11.2 ; C11.2@2.755,-4.6 3.3,-5.145 3.3,-5.25 3.5,-5.45 U4.1
VCC3A: C2.2 C3.2 C4.2 C9.2 C12.2 C14.2 C17.2 C19.2 U1.1 U3.1 U4.10 U5.13 U6.16 U7.5 | length 41
  Signal Layer 1 w0.12: v1(-6.7,-3.4) -6.2,-3.4 -5.7,-2.9 -3.854,-2.9 -2.7,-1.746 -2.7,-0.85 -2.06,-0.21 -2.06,-0.01 v1(-1.1,0.95)
  Signal Layer 1 w0.15: v1(0.3,-3.15) 0.65,-2.8 2.675,-2.8 3.125,-2.35 3.125,-2.25 v1@3.225,-2.15
  Signal Layer 2 w0.12: v1(-5.25,4.65) -4.8,5.1 -3.55,5.1 -1.65,3.2 v1(-1.65,3.1) -1.65,1.5 v1(-1.1,0.95) 0.3,-0.45 0.45,-0.45 0.75,-0.75 0.75,-2.7 v1(0.3,-3.15) v1@0.2,-3.25 ; v1(3.225,-2.25) 3.225,-3.888 4,-4.662 v1(4,-6.3)
  Bottom Layer w0.12: v1@-6.7,-3.45 -6.7,-3.995 C14.2@-6.6,-4.095 ; v1(-6.7,-3.4) -6.71,-3.39 -6.71,-1.91 -6.65,-1.85 U5.13 ; C19.2@-5.25,5.195 v1(-5.25,4.65) -5.25,4.6 -5,4.35 U7.5 ; C2.2@-1.375,3.68 -1.292,3.598 -1.247,3.552 C2.2@-1.245,3.55 ; C17.2@-1.25,-2.705 C17.2@-1.22,-2.705 ; C4.2 C4.2@-1.245,1.455 ; C17.2@-1.045,-2.705 C17.2@-1.22,-2.705 ; U6.16 -0.45,-3.15 ; v1(0.3,-3.15) -0.45,-3.15 ; v1(4,-6.3) 4.445,-6.3 4.495,-6.35 U4.10 ; C17.2@-1.22,-2.705 -0.775,-3.15 -0.45,-3.15
  Bottom Layer w0.2: v1(-1.65,3.1) -1.245,3.1 ; C2.2@-1.375,3.68 U1.1 ; C4.2@-1.245,1.455 -1.245,3.1 ; C2.2@-1.245,3.55 -1.245,3.1 ; C12.2@2.755,-3.65 2.755,-2.695 3.425,-2.025 U3.1@3.925,-2.025
VCC5: C6.2 C10.2 CN1.1 CN1.3 CN1.5 Q1.3 Q2.3 Q3.4 R3.1 R4.2 R9.2 U2.4 | length 87.1
  Signal Layer 1 w0.5: v1(-0.2,5.45) v1(2.8,5.45) 6,5.45 v1(6.25,5.7) ; v1(6.25,6.25) v1(6.25,5.7) ; v1(71.55,2.75) v1(71.05,2.75) 70.5,2.75 69.85,2.1 7.85,2.1 6.25,3.7 v1(6.25,4.85) v1(6.25,5.7)
  Signal Layer 2 w0.3: v1@-0.2,5.5 v1(-0.2,5.45) -0.2,4.593 0,4.393 0,3.614 0.3,3.314 0.3,1.85 v1@1.1,1.05
  Bottom Layer w0.2: Q1.3@-0.19,6.15 -0.19,4.935 R3.1@-0.155,4.9 ; U2.4 0.625,0.525 v1(1.1,1) ; Q2.3@2.74,6.15 2.74,4.91 R4.2 ; C10.2@6.005,3.25 6.005,4.605 v1(6.25,4.85)
  Bottom Layer w0.3: C6.2 0.75,1.475 1.081,1.144 1.081,1.019 v1(1.1,1)
  Bottom Layer w0.35: Q3.4@5.65,6.5 Q3.4 6,6.5 v1(6.25,6.25)
  Bottom Layer w0.4: v1(6.25,5.7) v1(6.25,6.25)
VCC5_CM: C1.2 Q1.2 R3.2 U1.4 | length 4.4
  Bottom Layer w0.2: U1.4 -1.195,5.73 -1.195,6.5 -1.095,6.6 0.1,6.6 0.29,6.41 0.29,6.25 0.79,5.75 0.79,4.935 R3.2@0.755,4.9
VCC5_H: Q3.3 R5.1 R6.1 R7.1 R8.1 R10.1 R11.1 R12.1 R13.1 R14.1 R15.1 R17.1 R18.1 | length 46.9
  Signal Layer 1 w0.3: v1(-4.25,-5.55) -4.25,-4.693 -1.477,-1.92 0.53,-1.92 1.45,-1 v1(2.3,-1) ; v1(-1.65,-0.2) -1.65,-0.15 -1.2,0.3 1.6,0.3 v1(2.3,1)
  Signal Layer 2 w0.3: v1(-5.75,5.65) -5.723,5.65 -5.373,6 v1(-2.55,6) ; v1@-2.527,5.973 -2.1,6.4 -1.4,6.4 -1.3,6.3 3.35,6.3 3.4,6.25 3.4,3.6 2.3,2.5 v1(2.3,1) v1(2.3,-1) 1.7,-1.6 1.7,-2.5 2.75,-3.55 2.75,-4.451 2.4,-4.801 v1(2.4,-6.05)
  Bottom Layer w0.2: R12.1@-6.25,5.195 -6.1,5.345 -6.055,5.345 v1(-5.75,5.65) ; R13.1@-3.25,5.195 -3.1,5.345 -3.055,5.345 v1@-2.55,5.85
  Bottom Layer w0.3: R18.1@-4.655,-6.05 -4.655,-5.55 ; R17.1@-4.655,-5.05 -4.655,-5.55 ; v1(-4.25,-5.55) -4.655,-5.55 ; v1(-1.65,-0.2) -1.245,-0.2 ; R15.1@-1.245,-0.725 -1.245,-0.2 ; R14.1@-1.245,0.325 -1.245,-0.2 ; R10.1@1.845,-1.5 1.845,-0.95 ; R6.1@1.845,-0.5 1.845,-0.95 ; R8.1@1.845,0.5 1.845,1 ; R7.1@1.845,1.5 1.845,1 ; v1(2.3,-1) 1.895,-1 1.845,-0.95 ; v1(2.3,1) 1.845,1 ; v1(2.4,-6.05) 2.755,-6.05 ; R5.1@2.755,-6.55 2.755,-6.05 ; R11.1@2.755,-5.55 2.755,-6.05
  Bottom Layer w0.35: v1(3.4,6.3) 3.4,6.4 3.5,6.5 3.8,6.5 4.45,6.5 4.575,6.375 Q3.3@4.75,6.375
pads on no net: U4.7 U5.7 U5.19 U5.21 U6.7 U7.7 U7.8
copper on no net: | length 0
  Bottom Layer w0.12: -3.65,3.751 -3.649,3.75 -3.65,3.751

## Polygon pours and split planes (outlines as drawn)
GND on Top Layer "GND_L01_P016" (solid, remove dead copper, pour order 16): -5.5,-7.5 5.5,-7.5 ccw(c5.5,-5.5) 7.5,-5.5 7.5,-5 cw(c9.5,-5) 9.5,-3 69.2,-3 cw(c69.2,-3.5) 69.501,-3.101 69.5,-3.1 69.5,-3.106 69.765,-3.372 ccw(c70.1,-3) 70.1,-3.5 73.6,-3.5 ccw(c73.6,-2.5) 74.6,-2.5 74.6,2.5 ccw(c73.6,2.5) 73.6,3.5 70.1,3.5 ccw(c70.1,3) 69.765,3.372 69.765,3.365 69.501,3.101 cw(c69.2,3.5) 69.2,3 9.5,3 cw(c9.5,5) 7.5,5 7.5,5.5 ccw(c5.5,5.5) 5.5,7.5 -5.5,7.5 ccw(c-5.5,5.5) -7.5,5.5 -7.5,-5.5 ccw(c-5.5,-5.5)
GND on Signal Layer 1 "GND_L03_P011" (solid, remove dead copper, pour order 11): -5.5,-7.5 5.5,-7.5 ccw(c5.5,-5.5) 7.5,-5.5 7.5,-5 7.5,4.995 7.5,5.5 ccw(c5.5,5.5) 5.5,7.5 -5.5,7.5 ccw(c-5.5,5.5) -7.5,5.5 -7.5,-5.5 ccw(c-5.5,-5.5)
no net on Layer0 "Default Coverlay 1 Top" (split plane): 7.5,-5.697 7.423,-6.083 7.272,-6.447 7.054,-6.775 6.775,-7.053 6.447,-7.272 6.083,-7.423 5.697,-7.5 5.5,-7.5 -5.5,-7.5 -5.697,-7.5 -6.083,-7.423 -6.447,-7.272 -6.775,-7.054 -7.054,-6.775 -7.272,-6.447 -7.423,-6.083 -7.5,-5.697 -7.5,5.697 -7.423,6.083 -7.272,6.447 -7.054,6.775 -6.775,7.054 -6.447,7.272 -6.083,7.423 -5.697,7.5 5.697,7.5 6.083,7.423 6.447,7.272 6.775,7.054 7.054,6.775 7.272,6.447 7.423,6.083 7.5,5.697
GND on Bottom Layer "GND_L04_P027" (solid, remove dead copper, pour order 27): -5.5,-7.5 5.5,-7.5 ccw(c5.5,-5.5) 7.5,-5.5 7.5,-5 cw(c9.5,-5) 9.5,-3 69.2,-3 cw(c69.2,-3.5) 69.501,-3.101 69.5,-3.1 69.5,-3.106 69.765,-3.372 ccw(c70.1,-3) 70.1,-3.5 73.6,-3.5 ccw(c73.6,-2.5) 74.6,-2.5 74.6,2.5 ccw(c73.6,2.5) 73.6,3.5 70.1,3.5 ccw(c70.1,3) 69.765,3.372 69.765,3.365 69.501,3.101 cw(c69.2,3.5) 69.2,3 9.5,3 cw(c9.5,5) 7.5,5 7.5,5.5 ccw(c5.5,5.5) 5.5,7.5 -5.5,7.5 ccw(c-5.5,5.5) -7.5,5.5 -7.5,-5.5 ccw(c-5.5,-5.5)
VCC5 on Bottom Layer "VCC5_L04_P015" (solid, pour order 15): 71,2.5 70.8,2.7 70.8,2.9 70.9,3 71,3 71.7,3 71.8,2.9 71.8,2.2 71.6,2 71.6,1.4 71.1,0.9 70.8,0.9 70.8,1.1 70.9,1.1 70.95,1.15 70.95,1.25 70.9,1.3 70.8,1.3 70.8,1.5 70.9,1.5 70.95,1.55 70.95,1.65 70.9,1.7 70.8,1.7 70.8,1.9 70.9,1.9 71,2
GND on Signal Layer 2 "GND_L02_P031" (solid, pour order 31): 69.25,4 75,4 75,-4 69.25,-4
GND on Signal Layer 2 "GND_L02_P029" (solid, remove dead copper, pour order 29): -8,8 7.4,8 7.4,-8 -8,-8
GND on Signal Layer 2 "GND_L02_P025" (hatched 45Degree grid 0.5 track 0.2, remove dead copper, pour order 25): 5.5,-7.5 7.5,-7.5 7.5,-5 cw(c9.5,-5) 9.5,-3 69.403,-3 69.891,-3.5 69.891,3.5 69.403,3 9.5,3 cw(c9.5,5) 7.5,5 7.5,7.5 5.5,7.5
no net on Layer0 "Default Coverlay 1 Bottom" (split plane): 7.5,-5.697 7.423,-6.083 7.272,-6.447 7.054,-6.775 6.775,-7.053 6.447,-7.272 6.083,-7.423 5.697,-7.5 5.5,-7.5 -5.5,-7.5 -5.697,-7.5 -6.083,-7.423 -6.447,-7.272 -6.775,-7.054 -7.054,-6.775 -7.272,-6.447 -7.423,-6.083 -7.5,-5.697 -7.5,5.697 -7.423,6.083 -7.272,6.447 -7.054,6.775 -6.775,7.054 -6.447,7.272 -6.083,7.423 -5.697,7.5 5.697,7.5 6.083,7.423 6.447,7.272 6.775,7.054 7.054,6.775 7.272,6.447 7.423,6.083 7.5,5.697
no net on Layer0 "Default Coverlay 3 Top" (split plane): 69.25,3.003 69.32,3.015 69.396,3.04 69.468,3.078 69.501,3.101 69.765,3.365 69.8,3.402 69.878,3.45 69.964,3.483 70.054,3.5 73.6,3.5 73.698,3.5 73.892,3.462 74.074,3.386 74.237,3.277 74.377,3.137 74.486,2.974 74.562,2.792 74.6,2.598 74.6,2.5 74.6,-2.5 74.6,-2.598 74.562,-2.792 74.486,-2.974 74.377,-3.137 74.237,-3.277 74.074,-3.386 73.892,-3.462 73.698,-3.5 70.1,-3.5 70.054,-3.5 69.964,-3.483 69.878,-3.45 69.8,-3.402 69.765,-3.372 69.5,-3.106 69.468,-3.078 69.396,-3.04 69.32,-3.015 69.25,-3.003
no net on Layer0 "Default Coverlay 3 Bottom" (split plane): 69.25,3.003 69.32,3.015 69.396,3.04 69.468,3.078 69.501,3.101 69.765,3.365 69.8,3.402 69.878,3.45 69.964,3.483 70.054,3.5 73.6,3.5 73.698,3.5 73.892,3.462 74.074,3.386 74.237,3.277 74.377,3.137 74.486,2.974 74.562,2.792 74.6,2.598 74.6,2.5 74.6,-2.5 74.6,-2.598 74.562,-2.792 74.486,-2.974 74.377,-3.137 74.237,-3.277 74.074,-3.386 73.892,-3.462 73.698,-3.5 70.1,-3.5 70.054,-3.5 69.964,-3.483 69.878,-3.45 69.8,-3.402 69.765,-3.372 69.5,-3.106 69.468,-3.078 69.396,-3.04 69.32,-3.015 69.25,-3.003

## Keep-outs
Keep-Out Layer:
  circle w2.6: c-5,-0.85 r0.075
  circle w1.4: c-4.75,3 r0.5

## Other copper
Top Layer:
  rectangle net GND: -2,-6.2 0.1,-4.1
  pour cut-out: 69.5,3.2 69.5,-3.2 69,-3.2 69,3.2
Bottom Layer:
  pour cut-out: 69.5,3.2 69.5,-3.2 69,-3.2 69,3.2

## Silkscreen, mask and mechanical layers (free items; w line width, h text height)
Top Overlay:
  circle w0.2: c-3.65,0 r0.1
  circle w0.3: c-3.65,0 r0.8
  region: 0.25,4.037 1.42,3.741 1.42,3.116 0.293,3.398 0.201,3.398 ccw(c0.201,3.321) 0.125,3.321 0.125,3.244 ccw(c0.307,3.244) 0.178,3.116 0.198,3.096 ccw(c0.315,3.212) 0.252,3.06 1.42,2.765 1.42,2.14 -0.248,2.552 -0.248,3.184 -0.058,3.146 -0.123,3.211 cw(c0.29,3.624) -0.294,3.624 -0.294,3.797 cw(c-0.008,3.797) -0.21,4 -0.186,4.024 cw(c-0.043,3.882) -0.043,4.083 -0.043,4.091 -0.116,4.164 cw(c0.315,4.595) -0.294,4.595 -0.294,4.724 -0.294,4.731 cw(c0.033,4.731) 0.033,5.059 1.161,4.784 1.222,4.754 1.306,4.685 1.359,4.609 1.397,4.525 1.42,4.434 1.42,4.091 0.27,4.381 0.209,4.381 ccw(c0.209,4.297) 0.125,4.297 0.125,4.221 ccw(c0.29,4.221) 0.173,4.104 0.22,4.057 ccw(c0.285,4.122) hole: -0.058,3.146 -0.058,3.139 -0.05,3.139 -0.05,3.146
  region: 11 vertices and 1 holes, not listed, extent -0.774,-4.916 1.42,-2.805
  region: 0.964,1.309 ccw(c0.925,1.27) 0.925,1.325 -0.248,1.63 -0.248,2.255 1.42,1.843 1.42,1.218 1.237,1.256 1.237,1.249 1.317,1.169 cw(c0.976,0.828) 1.458,0.828 1.458,0.599 cw(c1.179,0.599) 1.179,0.319 1.123,0.319 -0.248,0.654 -0.248,1.279 0.887,0.997 0.963,0.997 ccw(c0.963,1.081) 1.047,1.081 1.047,1.173 ccw(c0.918,1.173) 1.009,1.264
  region: 1.42,-0.877 1.42,-1.51 cw(c1.193,-1.459) 1.188,-1.693 1.123,-1.693 -0.759,-1.22 -0.759,-0.595 -0.248,-0.725 -0.248,-0.466 0.133,-0.557 0.133,-0.816 0.933,-1.022 0.959,-1.022 ccw(c0.959,-0.934) 1.047,-0.934 1.047,-0.784
  region: -0.774,-1.502 1.42,-2.058 1.42,-2.683 -0.774,-2.134
  region: -0.248,0.38 1.42,-0.031 1.42,-0.664 -0.248,-0.245
  region: 1.146,5.508 1.42,5.455 1.42,5.371 1.146,5.318 1.146,5.31 1.42,5.31 1.42,5.242 1.07,5.242 1.07,5.364 1.306,5.413 1.07,5.463 1.07,5.585 1.42,5.585 1.42,5.516 1.146,5.516
  region: 1.131,5.204 1.131,5.097 1.42,5.097 1.42,5.028 1.131,5.028 1.131,4.922 1.07,4.922 1.07,5.204
  region: 73.2,3 74,2.2 74,3
  lines w0.15: 73.2,3 74,2.2 74,3 73.9,3 73.2,3 ; 73.2,3 73.2,3
  lines w0.3: -6.65,0 -4.5,0 ; -6.6,-0.05 -6.025,-0.625 ; -6.6,0.05 -6.025,0.625
  text "KAME_IMU rev.1 2018" at 6,-5.5 h1.5 r90
Fab notes:
  lines w0.05: 7.5,-4.27 7.5,-5 ; 9.3,-3.7 9.4,-3.3 ; 9.5,-3.7 9.4,-3.3 ; 9.8,-4.6 9.4,-4.6 9.4,-3.3 ; 7.5,-5 cw(c9.5,-5) 9.5,-3 69.25,-3 69.25,3 9.5,3 cw(c9.5,5) 7.5,5 7.5,-5
  text "Flexible area" at 10,-5 h1.2
Private notes:
  text "627920-547375727520-526F626F74696373" at 10,-6 h1.2